# Altium PCB EEG_PCB.PcbDoc (part 1 of 2)
Units mm, origin at the board's own origin, x right, y up, seen from the top; angles counter-clockwise.
Board outline 100 x 50 mm, 4 copper layers (Top Layer, GND Layer, Power Layer, Bottom Layer), stack 0.568 mm thick; 118 components, 80 nets, 412 pads, 345 vias.
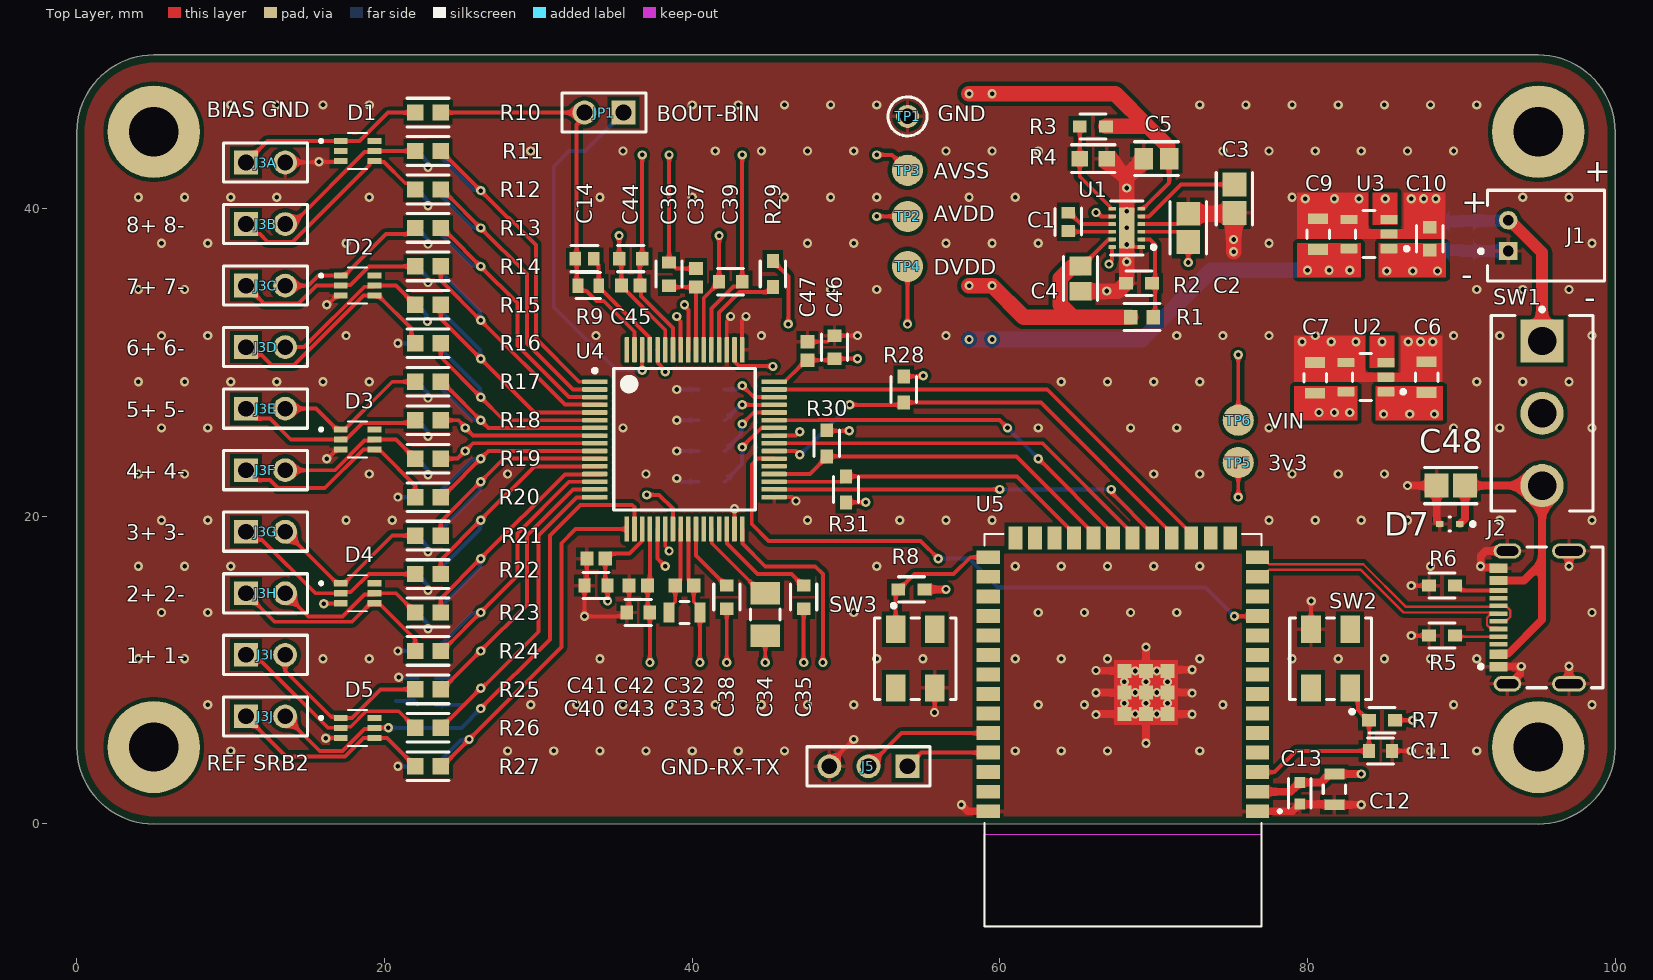
[diagram p0: Top Layer view]
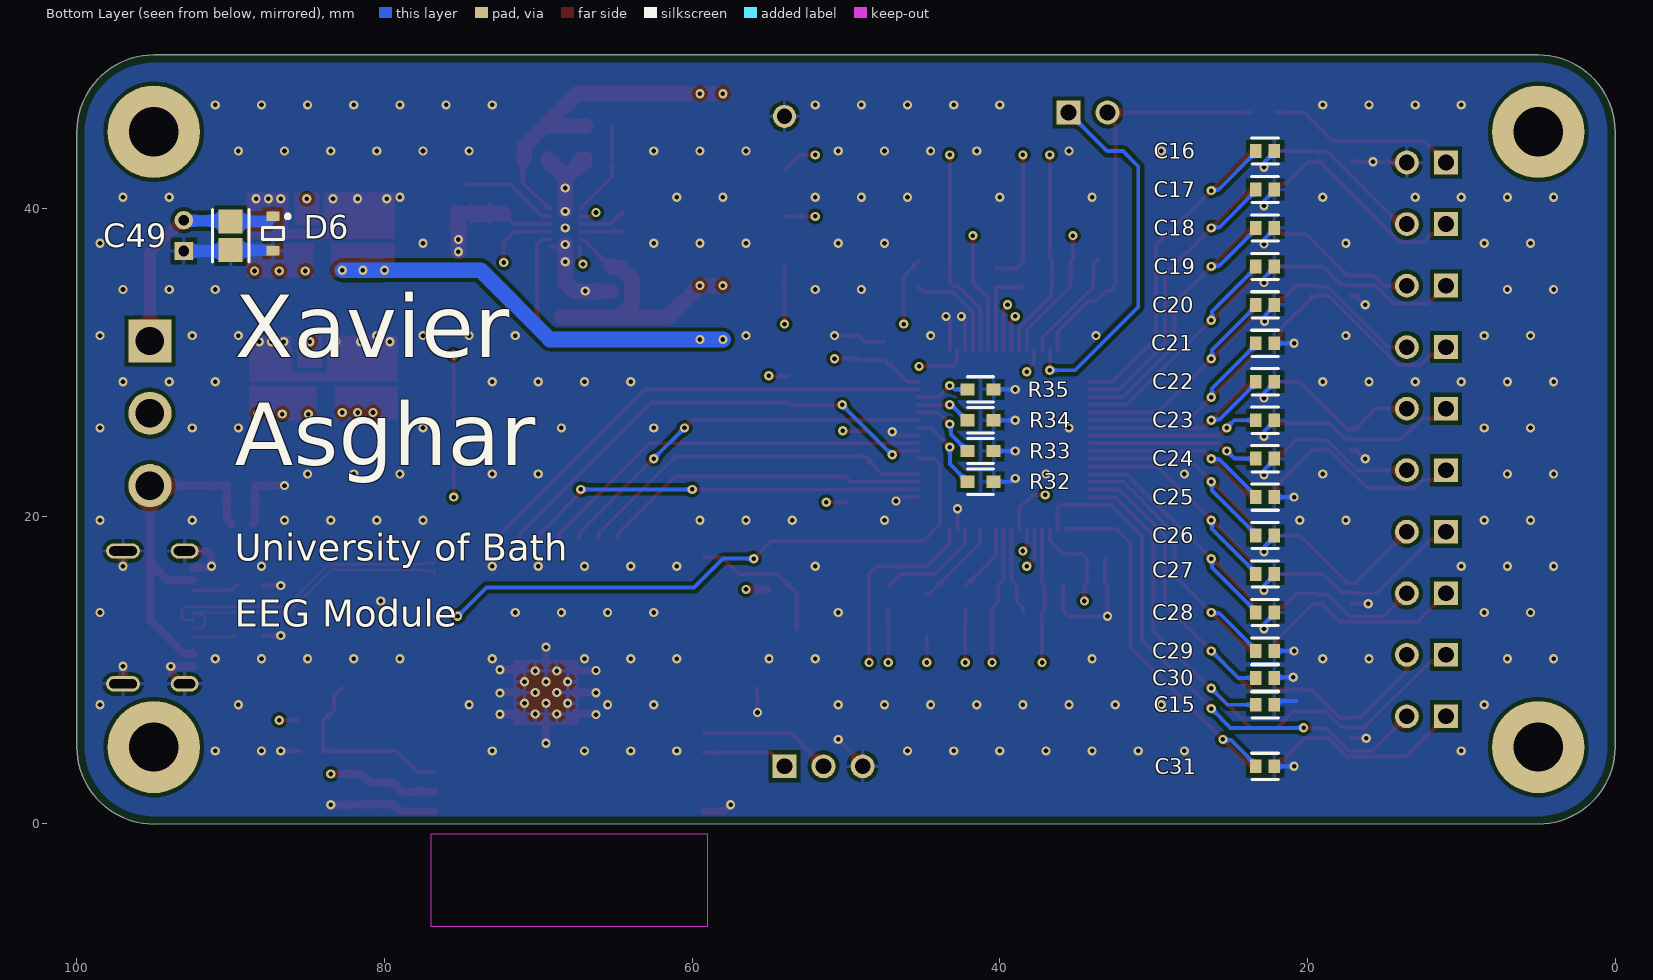
[diagram p1: Bottom Layer view, seen from below]
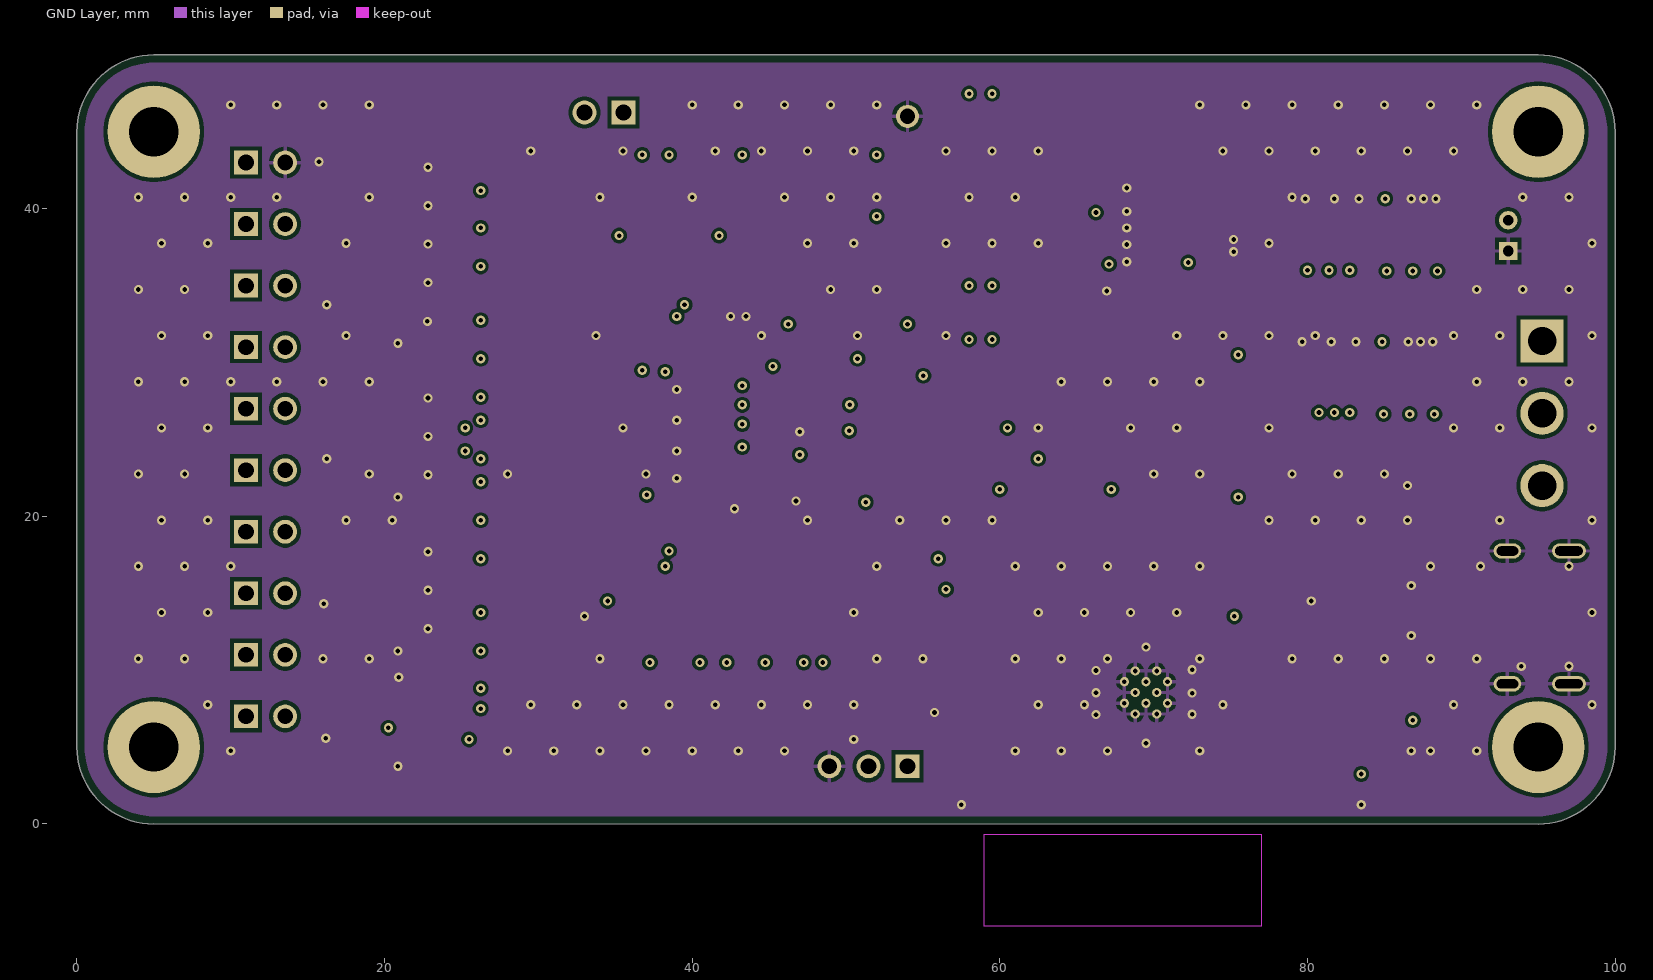
[diagram p2: GND Layer]
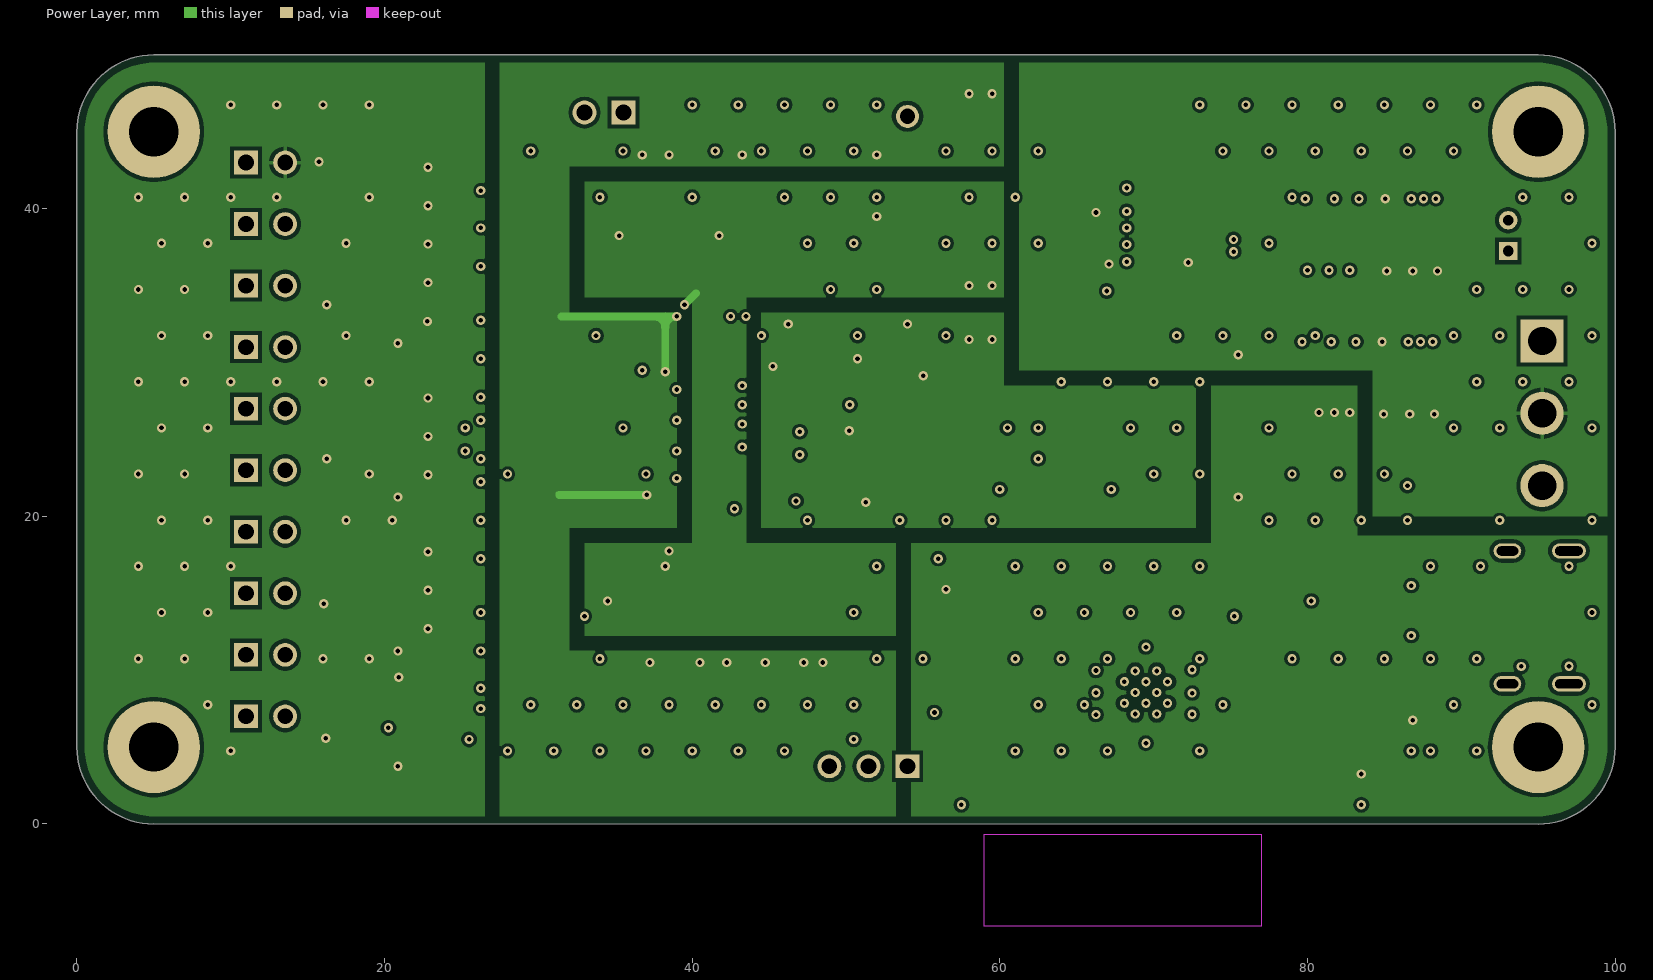
[diagram p3: Power Layer]
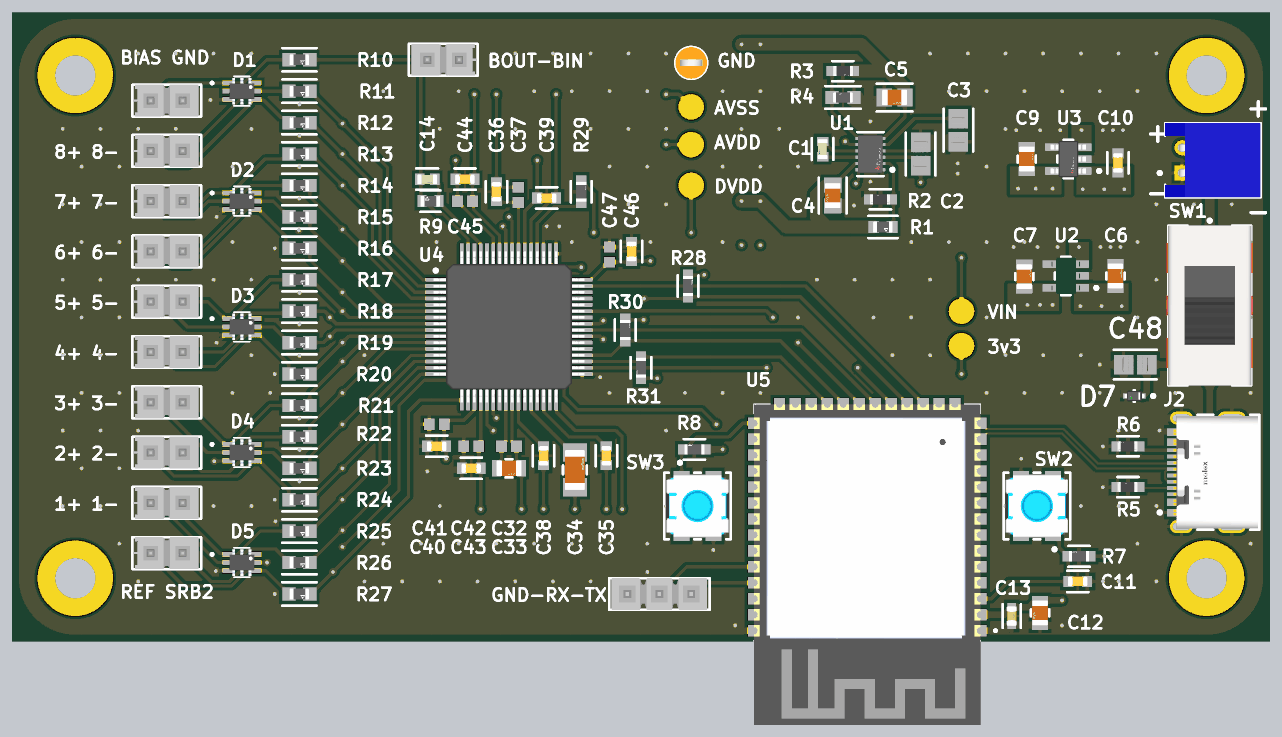
[diagram p5: 3D render of the assembled board from above, using the file's embedded part models]
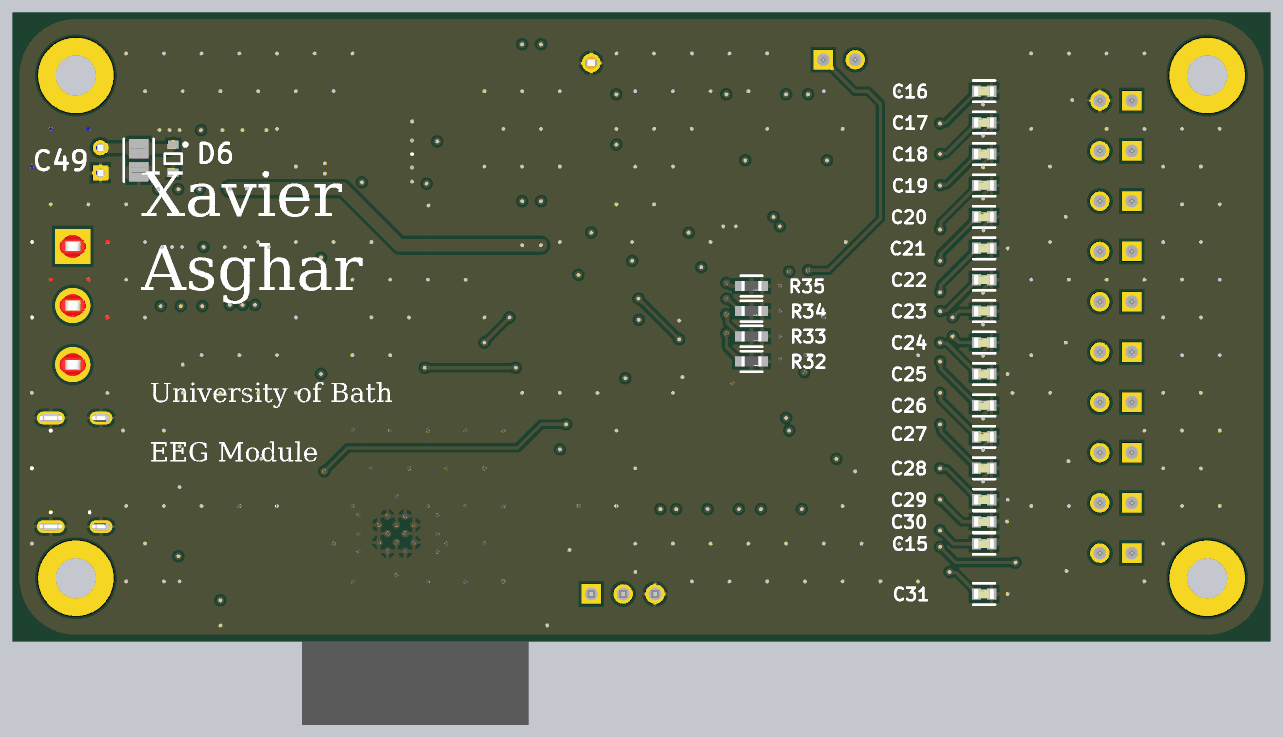
[diagram p6: 3D render of the assembled board from below, using the file's embedded part models]

## Layer stack, top to bottom
Top Solder: solder mask 0.0102, Solder Resist, Dk 3.5
Top Layer: signal copper 0.0356
Dielectric 2: prepreg 0.0711, PP-006, Dk 4.1
GND Layer: signal copper 0.0175
Dielectric 1: dielectric 0.32, FR-4, Dk 4.8
Power Layer: signal copper 0.0175
Dielectric 3: prepreg 0.0711, PP-006, Dk 4.1
Bottom Layer: signal copper 0.0356
Bottom Solder: solder mask 0.0102, Solder Resist, Dk 3.5

## Board outline
0,5 ccw(c5,5) 5,0 95,0 ccw(c95,5) 100,5 100,45 ccw(c95,45) 95,50 5,50 ccw(c5,45) 0,45

## Design rules (kind name [scope] priority, off if disabled: settings)
BoardOutlineClearance [All] p1: gap=0.508 ignorepadtopadclearanceinfootprint=FALSE except(0.3: Track-OutlineEdge Track-CavityEdge Track-CutoutEdge Track-SplitBarrior Track-SplitContinuation SMDPad-OutlineEdge SMDPad-CavityEdge SMDPad-CutoutEdge SMDPad-SplitBarrior SMDPad-SplitContinuation)
Clearance [All] p1: gap=0.254 ignorepadtopadclearanceinfootprint=FALSE except(0.1: Arc-Arc Arc-Track Arc-SMDPad Track-Track Track-SMDPad; 0.15: SMDPad-SMDPad; 0.2: Arc-Via Track-Via Via-Fill Via-Poly Via-Region Via-Hole; 0.45: SMDPad-Hole)
DiffPairsRouting [All] p1: maxlimit=0.254 minlimit=0.203 mostfreqgap=0.254 toplayer_maxgap=0.203 toplayer_prefgap=0.203 toplayer_minwidth=0.158 toplayer_maxwidth=0.158 toplayer_prefwidth=0.158 midlayer1_mingap=0.254 midlayer1_minwidth=0.381 midlayer1_maxwidth=0.381 midlayer1_prefwidth=0.381 midlayer2_mingap=0.254 midlayer2_minwidth=0.381 midlayer2_maxwidth=0.381 midlayer2_prefwidth=0.381 bottomlayer_mingap=0.254 bottomlayer_minwidth=0.381 bottomlayer_maxwidth=0.381 bottomlayer_prefwidth=0.381 maxuncoupledlength=12.7
HoleSize [All] p1: absolutevalues=TRUE maxlimit=6.3 minlimit=0.15 maxpercent=80.000 minpercent=20.000
HoleToHoleClearance [All] p1: gap=0.2 allowstackedmicrovias=TRUE
MinimumSolderMaskSliver [All] p1: minsoldermaskwidth=0.1
PlaneConnect [All] p1: pad.planeconnectstyle=Relief pad.reliefexpansion=0.508 pad.reliefentries=4 pad.reliefconductorwidth=0.254 pad.reliefairgap=0.254 via.planeconnectstyle=Direct via.reliefexpansion=0.508 via.reliefentries=4 via.reliefconductorwidth=0.254 via.reliefairgap=0.254
PolygonConnect [All] p1: thpad.connectstyle=Relief thpad.reliefconductorwidth=0.254 thpad.reliefentries=4 thpad.polygonreliefangle="90 Angle" thpad.airgapwidth=0.254 smdpad.connectstyle=Relief smdpad.reliefconductorwidth=0.254 smdpad.reliefentries=4 smdpad.polygonreliefangle="90 Angle" smdpad.airgapwidth=0.254 via.connectstyle=Direct via.reliefconductorwidth=0.254 via.reliefentries=4 via.polygonreliefangle="90 Angle" via.airgapwidth=0.254
RoutingVias [All] p1: holewidth=0.3 width=0.6 viastyle="Through Hole" minholewidth=0.15 minwidth=0.25 maxholewidth=0.711 maxwidth=1.27
SilkToSilkClearance [All] p1: silktosilkclearance=0.15
SilkToSolderMaskClearance [IsPad] p1: minsilkscreentomaskgap=0.2 clearancetoexposedcopper=TRUE
SolderMaskExpansion SolderMaskExpansion_Vias [IsVia] p1: expansion=0.102 istentingtop=TRUE
SolderMaskExpansion SolderMaskExpansion_All [All] p2: expansion=0.05 istentingtop=FALSE
SupplyNets "Schematic Supply Nets_8" [InNet('AVSS')] p1: voltage=0.000
SupplyNets "Schematic Supply Nets_7" [InNet('VBUS')] p2: voltage=0.000
SupplyNets "Schematic Supply Nets_6" [InNet('DVDD')] p3: voltage=0.000
SupplyNets "Schematic Supply Nets_4" [InNet('VIN')] p4: voltage=0.000
SupplyNets "Schematic Supply Nets_3" [InNet('3v3')] p5: voltage=0.000
SupplyNets "Schematic Supply Nets_2" [InNet('AVDD')] p6: voltage=0.000
SupplyNets "Schematic Supply Nets_1" [InNet('VBAT')] p7: voltage=0.000
SupplyNets "Schematic Supply Nets" [InNet('GND')] p8: voltage=0.000
Width [All] p1: maxlimit=1.27 minlimit=0.1 preferedwidth=1.016 toplayer_prefwidth=0.254 midlayer1_prefwidth=0.254 bottomlayer_prefwidth=0.254 minimp=50.000000 maximp=50.000000 favimp=50.000000
23 further rules are at their usual default settings.

## Classes and differential pairs
differential pair USB_D: +USB_D_P -USB_D_N

## Components (designator, comment, footprint, x,y, rotation, side; value= is the part's Value field where it differs from the comment)
C1 "0.47uF" FP-C0603C-CF-MFG 64.45,39.15 r90 top value="0.47 μF"
C2 "4.7uF" FP-GCJ21B-0_3-IPC_A 72.25,38.75 r90 top
C3 "4.7uF" FP-GCJ21B-0_3-IPC_A 75.25,40.65 r270 top
C4 "2.2uF" FP-GCM21B-0_15-IPC_B 65.25,35.45 r270 top
C5 "2.2uF" FP-GCM21B-0_15-IPC_B 70.176,43.25 r0 top
C6 "10uF" FP-GRJ21B-0_3-0_2-MFG 87.75,29.05 r90 top
C7 "10uF" FP-GRJ21B-0_3-0_2-MFG 80.5,29 r90 top
C9 "10uF" FP-GRJ21B-0_3-0_2-MFG 80.7,38.35 r90 top
C10 "1uF" FP-CC0603-DA-MFG 87.95,38.05 r90 top value="1 uF"
C11 "1uF" FP-CC0603-DA-MFG 84.75,4.75 r0 top value="1 uF"
C12 "10uF" FP-GRJ21B-0_3-0_2-MFG 81.75,2.25 r270 top
C13 "0.1uF" FP-CGA3E-0_3-0_1-MFG 79.5,2 r270 top
C14 "1.5nF" FP-C0603C-CF-MFG 33,36.75 r180 top value="1,500 pF"
C15 "1nF" FP-C0603C-CF-MFG 22.75,7.75 r180 bottom value="1,000 pF"
C16 "1nF" FP-C0603C-CF-MFG 22.75,43.75 r180 bottom value="1,000 pF"
C17 "1nF" FP-C0603C-CF-MFG 22.75,41.25 r180 bottom value="1,000 pF"
C18 "1nF" FP-C0603C-CF-MFG 22.75,38.75 r180 bottom value="1,000 pF"
C19 "1nF" FP-C0603C-CF-MFG 22.75,36.25 r180 bottom value="1,000 pF"
C20 "1nF" FP-C0603C-CF-MFG 22.75,33.75 r180 bottom value="1,000 pF"
C21 "1nF" FP-C0603C-CF-MFG 22.75,31.25 r180 bottom value="1,000 pF"
C22 "1nF" FP-C0603C-CF-MFG 22.75,28.75 r180 bottom value="1,000 pF"
C23 "1nF" FP-C0603C-CF-MFG 22.75,26.25 r180 bottom value="1,000 pF"
C24 "1nF" FP-C0603C-CF-MFG 22.75,23.75 r180 bottom value="1,000 pF"
C25 "1nF" FP-C0603C-CF-MFG 22.75,21.25 r180 bottom value="1,000 pF"
C26 "1nF" FP-C0603C-CF-MFG 22.75,18.75 r180 bottom value="1,000 pF"
C27 "1nF" FP-C0603C-CF-MFG 22.75,16.25 r180 bottom value="1,000 pF"
C28 "1nF" FP-C0603C-CF-MFG 22.75,13.75 r180 bottom value="1,000 pF"
C29 "1nF" FP-C0603C-CF-MFG 22.75,11.25 r180 bottom value="1,000 pF"
C30 "1nF" FP-C0603C-CF-MFG 22.75,9.5 r180 bottom value="1,000 pF"
C31 "1nF" FP-C0603C-CF-MFG 22.75,3.75 r180 bottom value="1,000 pF"
C32 "0.1uF" CAPC1608X87X45LL20T05 39.5,15.5 r180 top
C33 "10uF" FP-GRJ21B-0_3-0_2-MFG 39.5,13.75 r0 top
C34 "100uF" FP-GRM31C-0_3-e0_3_0_8-IPC_B 44.75,13.625 r90 top
C35 "1uF" FP-CC0603-DA-MFG 47.25,14.75 r270 top value="1 uF"
C36 "1uF" FP-CC0603-DA-MFG 38.5,35.75 r90 top value="1 uF"
C37 "0.1uF" CAPC1608X87X45LL20T05 40.25,35.5 r270 top
C38 "1uF" FP-CC0603-DA-MFG 42.25,14.75 r270 top value="1 uF"
C39 "1uF" FP-CC0603-DA-MFG 42.5,35.25 r0 top value="1 uF"
C40 "1uF" FP-CC0603-DA-MFG 33.75,15.5 r180 top value="1 uF"
C41 "0.1uF" CAPC1608X87X45LL20T05 33.75,17.25 r0 top
C42 "0.1uF" CAPC1608X87X45LL20T05 36.5,15.5 r0 top
C43 "1uF" FP-CC0603-DA-MFG 36.5,13.75 r180 top value="1 uF"
C44 "1uF" FP-CC0603-DA-MFG 36,36.75 r0 top value="1 uF"
C45 "0.1uF" CAPC1608X87X45LL20T05 36,35 r180 top
C46 "1uF" FP-CC0603-DA-MFG 49.25,31 r90 top value="1 uF"
C47 "0.1uF" CAPC1608X87X45LL20T05 47.5,30.75 r270 top
C48 "4.7uF" FP-GCJ21B-0_3-IPC_A 89.325,22 r180 top
C49 "4.7uF" FP-GCJ21B-0_3-IPC_A 90,38.25 r270 bottom
D1 "TPD4E1B06DCKR" TVS_TPD4E1B06DCKR 18.25,43.75 r0 top
D2 "TPD4E1B06DCKR" TVS_TPD4E1B06DCKR 18.25,35 r0 top
D3 "TPD4E1B06DCKR" TVS_TPD4E1B06DCKR 18.25,25 r0 top
D4 "TPD4E1B06DCKR" TVS_TPD4E1B06DCKR 18.25,15 r0 top
D5 "TPD4E1B06DCKR" TVS_TPD4E1B06DCKR 18.25,6.25 r0 top
D6 "SD05T1G" ONSC-SOD-323-2-477-02_G_V 87.25,38.385 r270 bottom
D7 "ESD5Z5.0T5G" FP-502-01-MFG 89.25,19.5 r180 top
J1 "S2B-PH-K-S(LF)(SN)" JST-S2B-PH-K-S_V 95.5,38.25 r90 top
J2 "217179-0001" FP-2171790001-MFG 95.85,13.43 r90 top
J3A "TSW-102-26-F-S" SMTC-TSW-102-26-XX-S 11,43 r0 top
J3B "TSW-102-26-F-S" SMTC-TSW-102-26-XX-S 11,39 r0 top
J3C "TSW-102-26-F-S" SMTC-TSW-102-26-XX-S 11,35 r0 top
J3D "TSW-102-26-F-S" SMTC-TSW-102-26-XX-S 11,31 r0 top
J3E "TSW-102-26-F-S" SMTC-TSW-102-26-XX-S 11,27 r0 top
J3F "TSW-102-26-F-S" SMTC-TSW-102-26-XX-S 11,23 r0 top
J3G "TSW-102-26-F-S" SMTC-TSW-102-26-XX-S 11,19 r0 top
J3H "TSW-102-26-F-S" SMTC-TSW-102-26-XX-S 11,15 r0 top
J3I "TSW-102-26-F-S" SMTC-TSW-102-26-XX-S 11,11 r0 top
J3J "TSW-102-26-F-S" SMTC-TSW-102-26-XX-S 11,7 r0 top
J5 "TSW-103-07-T-S" SMTC-TSW-103-07-X-S 54,3.75 r180 top
JP1 "TSW-102-26-F-S" SMTC-TSW-102-26-XX-S 35.54,46.25 r180 top
R1 "130k" FP-MCT0603-IPC_B 69.25,32.95 r0 top
R2 "120k" FP-RT0603-MFG 69.05,35.15 r180 top value=120KΩ
R3 "105k" FP-RT0603-MFG 66.05,45.35 r0 top value=105KΩ
R4 "100k" FP-AT0603-IPC_A 66.073,43.25 r180 top
R5 "5.1k" FP-RT0603-MFG 88.75,12.25 r180 top value=5.1KΩ
R6 "5.1k" FP-RT0603-MFG 88.75,15.5 r180 top value=5.1KΩ
R7 "10k" FP-AC0603-MFG 84.85,6.75 r180 top
R8 "10k" FP-AC0603-MFG 54.25,15.25 r180 top
R9 "1M" FP-MCT0603-MFG 33.25,35 r180 top
R10 "2.2k" FP-MCT0603-IPC_A 22.829,46.25 r0 top
R11 "2.2k" FP-MCT0603-IPC_A 22.829,43.75 r0 top
R12 "2.2k" FP-MCT0603-IPC_A 22.829,41.25 r0 top
R13 "2.2k" FP-MCT0603-IPC_A 22.829,38.75 r0 top
R14 "2.2k" FP-MCT0603-IPC_A 22.829,36.25 r0 top
R15 "2.2k" FP-MCT0603-IPC_A 22.829,33.75 r0 top
R16 "2.2k" FP-MCT0603-IPC_A 22.829,31.25 r0 top
R17 "2.2k" FP-MCT0603-IPC_A 22.829,28.75 r0 top
R18 "2.2k" FP-MCT0603-IPC_A 22.829,26.25 r0 top
R19 "2.2k" FP-MCT0603-IPC_A 22.829,23.75 r0 top
R20 "2.2k" FP-MCT0603-IPC_A 22.829,21.25 r0 top
R21 "2.2k" FP-MCT0603-IPC_A 22.829,18.75 r0 top
R22 "2.2k" FP-MCT0603-IPC_A 22.829,16.25 r0 top
R23 "2.2k" FP-MCT0603-IPC_A 22.829,13.75 r0 top
R24 "2.2k" FP-MCT0603-IPC_A 22.829,11.25 r0 top
R25 "2.2k" FP-MCT0603-IPC_A 22.829,8.75 r0 top
R26 "2.2k" FP-MCT0603-IPC_A 22.829,6.25 r0 top
R27 "2.2k" FP-MCT0603-IPC_A 22.829,3.75 r0 top
R28 "10k" FP-AC0603-MFG 53.75,28.25 r90 top
R29 "10k" FP-AC0603-MFG 45.25,35.75 r90 top
R30 "10k" FP-AC0603-MFG 48.75,24.75 r90 top
R31 "10k" FP-AC0603-MFG 50,21.75 r270 top
R32 "10k" FP-AC0603-MFG 41.25,22.25 r180 bottom
R33 "10k" FP-AC0603-MFG 41.25,24.25 r180 bottom
R34 "10k" FP-AC0603-MFG 41.25,26.25 r180 bottom
R35 "10k" FP-AC0603-MFG 41.25,28.25 r180 bottom
SW1 "1101M2S3CQE2" FP-1101M2S3CQE2-MFG 95.25,26.7 r270 top
SW2 "7914J-1-032" FP-7914J-1-032-MFG 81.5,10.75 r180 top
SW3 "7914J-1-032" FP-7914J-1-032-MFG 54.5,10.75 r0 top
TP1 "" KSTN-5003 54,46 r0 top
TP2 "TP" TP_SMD_2MM 54,39.5 r0 top
TP3 "TP" TP_SMD_2MM 54,42.5 r0 top
TP4 "TP" TP_SMD_2MM 54,36.25 r0 top
TP5 "TP" TP_SMD_2MM 75.5,23.5 r0 top
TP6 "TP" TP_SMD_2MM 75.5,26.25 r0 top
U1 "LM27762DSSR" FP-DSS0012B-MFG 68.25,38.75 r180 top
U2 "TLV75733PDBVR" FP-DBV0005A-MFG 83.8,29.05 r180 top
U3 "TPS7A2033PDBVR" FP-DBV0005A-MFG 84,38.35 r180 top
U4 "ADS1299IPAGR" PAG0064A_M 39.5,25 r0 top
U5 "ESP32-S3-WROOM-1-N8R8" XCVR_ESP32S3WROOM1N8R8 68,6.09 r180 top

## Footprints (in the part's own frame and the unit in brackets; to place one, negate y for a bottom-side part, rotate by r counter-clockwise, add the part's x,y. Pads: shape width x height; smd on the part's side, far side on the other; paste and mask are expansions set on the pad)
CAPC1608X87X45LL20T05 [mm] "Chip Capacitor, 2-Leads, Body 1.60x0.80mm, IPC High Density"
  rect 0.85x0.9 smd: 1(-0.6,0) 2(0.6,0)
  body extent -0.9,-0.5 0.9,0.5, height 0.87
FP-502-01-MFG [mm]
  rect 0.48x0.4 smd paste+0 mask+0: 1(-0.66,0) 2(0.66,0)
  silkscreen extent -1.63,-0.45 0.05,0.45, body extent -1,-0.55 1,0.55, height 0.25
FP-1101M2S3CQE2-MFG [mm]
  rect 2.8x2.8 hole 1.85 paste-2539.97 mask+0: 1(-4.7,0)
  round 2.8 hole 1.85 paste-2539.97 mask+0: 2(0,0) 3(4.7,0)
  silkscreen extent -6.87,-3.3 6.35,3.3, body extent -6.45,-3.4 6.45,3.4, height 0.25
FP-7914J-1-032-MFG [mm]
  rect 1.27x1.78 smd paste+0 mask+0: 1_1-(-1.27,1.905) 1_2+(1.27,1.905) 2_1-(-1.27,-1.905) 2_2+(1.27,-1.905)
  silkscreen extent -2.65,-2.65 2.65,3.57, body extent -2.75,-2.9 2.75,2.9, height 0.25
FP-2171790001-MFG [mm]
  rrect100% 1x1.8 hole 1.4 slot 0.6 at 0 deg paste-2539.97 mask+0: 1(-4.32,2.85) 2(4.32,2.85)
  rrect100% 1x2.2 hole 1.8 slot 0.6 at 0 deg paste-2539.97 mask+0: 3(-4.32,-1.15) 4(4.32,-1.15)
  rect 0.6x1.15 smd paste+0 mask+0: A1-B12(-3.2,3.425) A4-B9(-2.4,3.425) B1-A12(3.2,3.425) B4-A9(2.4,3.425)
  rect 0.3x1.15 smd paste+0 mask+0: A5(-1.25,3.425) A6(-0.25,3.425) A7(0.25,3.425) A8(1.25,3.425) B5(1.75,3.425) B6(0.75,3.425) B7(-0.75,3.425) B8(-1.75,3.425)
  silkscreen extent -4.57,-3.35 4.57,4.7, body extent -4.92,-3.45 4.92,4.1, height 0.25
FP-AC0603-MFG [mm]
  rect 0.9x0.8 smd paste+0 mask+0: 1(-0.85,0) 2(0.85,0)
  silkscreen extent -0.85,-0.82 0.85,0.82, body extent -1.4,-0.55 1.4,0.55, height 0.25
FP-AT0603-IPC_A [mm]
  rect 1.059x1.012 smd paste+0 mask+0: 1(-0.877,0) 2(0.877,0)
  silkscreen extent -1.41,-0.91 1.41,0.91, body extent -1.91,-1.01 1.91,1.01, height 0.25
FP-C0603C-CF-MFG [mm]
  rect 0.75x0.9 smd paste+0 mask+0: 1(-0.6,0) 2(0.6,0)
  silkscreen extent -0.87,-0.85 0.88,0.85, body extent -1.2,-0.6 1.2,0.6, height 0.25
FP-CC0603-DA-MFG [mm]
  rect 0.8x0.9 smd paste+0 mask+0: 1(-0.75,0) 2(0.75,0)
  silkscreen extent -0.85,-0.85 0.85,0.85, body extent -1.35,-0.75 1.35,0.75, height 0.25
FP-CGA3E-0_3-0_1-MFG [mm]
  rect 0.7x0.7 smd paste+0 mask+0: 1(-0.7,0) 2(0.7,0)
  silkscreen extent -0.95,-0.72 0.95,0.72, body extent -1.15,-0.65 1.15,0.65, height 0.25
FP-DBV0005A-MFG [mm]
  rrect17% 1.1x0.6 smd paste+0 mask+0: 1(-1.3,0.95) 2(-1.3,0) 3(-1.3,-0.95) 4(1.3,-0.95) 5(1.3,0.95)
  silkscreen extent -2.55,-1.53 0.87,1.52, body extent -1.95,-1.78 1.95,1.78, height 0.25
FP-DSS0012B-MFG [mm]
  rrect40% 0.5x0.25 smd paste+0 mask+0: 1(-0.95,1.25) 2(-0.95,0.75) 3(-0.95,0.25) 4(-0.95,-0.25) 5(-0.95,-0.75) 6(-0.95,-1.25) 7(0.95,-1.25) 8(0.95,-0.75) 9(0.95,-0.25) 10(0.95,0.25) 11(0.95,0.75) 12(0.95,1.25)
  rrect10% 1x2.65 smd paste-1000 mask+0: 13(0,0)
  silkscreen extent -1.88,-1.75 1.05,1.75, body extent -1.3,-1.65 1.3,1.65, height 0.25
FP-GCJ21B-0_3-IPC_A [mm]
  rect 1.553x1.556 smd paste+0 mask+0: 1(-0.925,0) 2(0.925,0)
  silkscreen extent -1.7,-1.18 1.7,1.18, body extent -2.2,-1.28 2.2,1.28, height 0.25
FP-GCM21B-0_15-IPC_B [mm]
  rect 1.206x1.408 smd paste+0 mask+0: 1(-0.826,0) 2(0.826,0)
  silkscreen extent -1.43,-1.1 1.43,1.1, body extent -1.68,-0.95 1.68,0.95, height 0.25
FP-GRJ21B-0_3-0_2-MFG [mm]
  rect 0.7x1.3 smd paste+0 mask+0: 1(-1,0) 2(1,0)
  silkscreen extent -0.28,-0.72 0.28,0.72, body extent -1.45,-0.82 1.45,0.82, height 0.25
FP-GRM31C-0_3-e0_3_0_8-IPC_B [mm]
  rect 1.453x1.904 smd paste+0 mask+0: 1(-1.375,0) 2(1.375,0)
  silkscreen extent -0.35,-0.95 0.35,0.95, body extent -2.35,-1.2 2.35,1.2, height 0.25
FP-MCT0603-IPC_A [mm]
  rect 1.064x1.062 smd paste+0 mask+0: 1(-0.829,0) 2(0.829,0)
  silkscreen extent -1.36,-0.93 1.36,0.93, body extent -1.86,-1.03 1.86,1.03, height 0.25
FP-MCT0603-IPC_B [mm]
  rect 0.864x0.962 smd paste+0 mask+0: 1(-0.729,0) 2(0.729,0)
  silkscreen extent -1.16,-0.88 1.16,0.88, body extent -1.41,-0.73 1.41,0.73, height 0.25
FP-MCT0603-MFG [mm]
  rect 0.7x0.95 smd paste+0 mask+0: 1(-0.675,0) 2(0.675,0)
  silkscreen extent -0.8,-0.85 0.8,0.85, body extent -1.12,-0.58 1.12,0.58, height 0.25
FP-RT0603-MFG [mm]
  rect 0.9x0.8 smd paste+0 mask+0: 1(-0.85,0) 2(0.85,0)
  silkscreen extent -0.85,-0.81 0.86,0.8, body extent -1.4,-0.55 1.4,0.55, height 0.25
JST-S2B-PH-K-S_V [mm] "THD, 2-Leads, Body 7.6x5.9mm, Pitch 2mm"
  rect 1.2x1.2 hole 0.7: 1(-1,2.45)
  round 1.2 hole 0.7: 2(1,2.45)
  silkscreen extent -2.95,-3.8 2.95,4.35, body extent -2.95,-3.8 2.95,3.8, height 4.8
KSTN-5003 [mm] "Test Point, Through Hole, Dia 2.54mm"
  round 1.5 hole 1: 1(0,0)
  silkscreen extent -1.27,-1.27 1.27,1.27, body extent -1.27,-1.27 1.27,1.27, height 4.57
ONSC-SOD-323-2-477-02_G_V [mm] "SOD, 2-Leads, Body 1.7x1.25mm"
  rect 0.63x0.83 smd: 1(-1.115,0) 2(1.115,0)
  silkscreen extent -1.24,-0.67 0.4,1.09, body extent -0.85,-0.63 0.85,0.63, height 1.06
PAG0064A_M [mm] "QFP, 64-Leads, Body 10x10mm, Pitch 0.5mm, IPC Low Density"
  rrect33% 1.65x0.3 smd: 1(-5.825,3.75) 2(-5.825,3.25) 3(-5.825,2.75) 4(-5.825,2.25) 5(-5.825,1.75) 6(-5.825,1.25) 7(-5.825,0.75) 8(-5.825,0.25) 9(-5.825,-0.25) 10(-5.825,-0.75) 11(-5.825,-1.25) 12(-5.825,-1.75) 13(-5.825,-2.25) 14(-5.825,-2.75) 15(-5.825,-3.25) 16(-5.825,-3.75) 33(5.825,-3.75) 34(5.825,-3.25) 35(5.825,-2.75) 36(5.825,-2.25) 37(5.825,-1.75) 38(5.825,-1.25) 39(5.825,-0.75) 40(5.825,-0.25) 41(5.825,0.25) 42(5.825,0.75) 43(5.825,1.25) 44(5.825,1.75) 45(5.825,2.25) 46(5.825,2.75) 47(5.825,3.25) 48(5.825,3.75)
  rrect33% 0.3x1.65 smd: 17(-3.75,-5.825) 18(-3.25,-5.825) 19(-2.75,-5.825) 20(-2.25,-5.825) 21(-1.75,-5.825) 22(-1.25,-5.825) 23(-0.75,-5.825) 24(-0.25,-5.825) 25(0.25,-5.825) 26(0.75,-5.825) 27(1.25,-5.825) 28(1.75,-5.825) 29(2.25,-5.825) 30(2.75,-5.825) 31(3.25,-5.825) 32(3.75,-5.825) 49(3.75,5.825) 50(3.25,5.825) 51(2.75,5.825) 52(2.25,5.825) 53(1.75,5.825) 54(1.25,5.825) 55(0.75,5.825) 56(0.25,5.825) 57(-0.25,5.825) 58(-0.75,5.825) 59(-1.25,5.825) 60(-1.75,5.825) 61(-2.25,5.825) 62(-2.75,5.825) 63(-3.25,5.825) 64(-3.75,5.825)
  silkscreen extent -5.95,-4.6 4.6,4.6, body extent -6,-6 6,6, height 1.09
SMTC-TSW-102-26-XX-S [mm] ".025 SQ Post Terminal Strip Assembly, 1x2 Pins, Vertical, 2.54mm Pitch, Male"
  rect 1.55x1.55 hole 1.02: 1(0,0)
  round 1.55 hole 1.02: 2(2.54,0)
  silkscreen extent -1.46,-1.27 4,1.27, body extent -1.4,-1.27 3.81,1.27, height 8.38
SMTC-TSW-103-07-X-S [mm] ".025 SQ Post Terminal Strip Assembly, 1x3 Pins, Vertical, 2.54mm Pitch, Male"
  rect 1.55x1.55 hole 1.02: 1(0,0)
  round 1.55 hole 1.02: 2(2.54,0) 3(5.08,0)
  silkscreen extent -1.46,-1.27 6.54,1.27, body extent -1.27,-1.27 6.35,1.27, height 8.38
TP_SMD_2MM [mil] "Circular Test Point (2mm radius)"
  round 80 smd paste-99999 mask+4: 1(0,0)
TVS_TPD4E1B06DCKR [mm]
  rect 0.9x0.4 smd paste-0.025: 1(-1.1,0.65) 2(-1.1,0) 3(-1.1,-0.65) 4(1.1,-0.65) 5(1.1,0) 6(1.1,0.65)
  silkscreen extent -2.47,-1.17 0.63,1.17, body extent -1.05,-1 1.05,1, height 1.1
XCVR_ESP32S3WROOM1N8R8 [mm]
  rect 1.5x0.9 smd: 1(-8.75,5.26) 2(-8.75,3.99) 3(-8.75,2.72) 4(-8.75,1.45) 5(-8.75,0.18) 6(-8.75,-1.09) 7(-8.75,-2.36) 8(-8.75,-3.63) 9(-8.75,-4.9) 10(-8.75,-6.17) 11(-8.75,-7.44) 12(-8.75,-8.71) 13(-8.75,-9.98) 14(-8.75,-11.25) 27(8.75,-11.25) 28(8.75,-9.98) 29(8.75,-8.71) 30(8.75,-7.44) 31(8.75,-6.17) 32(8.75,-4.9) 33(8.75,-3.63) 34(8.75,-2.36) 35(8.75,-1.09) 36(8.75,0.18) 37(8.75,1.45) 38(8.75,2.72) 39(8.75,3.99) 40(8.75,5.26)
  rect 0.9x1.5 smd: 15(-6.985,-12.5) 16(-5.715,-12.5) 17(-4.445,-12.5) 18(-3.175,-12.5) 19(-1.905,-12.5) 20(-0.635,-12.5) 21(0.635,-12.5) 22(1.905,-12.5) 23(3.175,-12.5) 24(4.445,-12.5) 25(5.715,-12.5) 26(6.985,-12.5)
  rect 0.9x0.9 smd: 41_1(-1.5,-2.46) 41_2(-2.9,-2.46) 41_3(-0.1,-2.46) 41_4(-2.9,-3.86) 41_5(-1.5,-3.86) 41_6(-0.1,-3.86) 41_7(-2.9,-1.06) 41_8(-1.5,-1.06) 41_9(-0.1,-1.06)
  round 0.6 hole 0.3 mask+0: 41_10(-1.5,-1.76) 41_11(-2.9,-1.76) 41_12(-0.1,-1.76) 41_13(-2.9,-3.16) 41_14(-1.5,-3.16) 41_15(-0.1,-3.16) 41_16(-2.2,-1.06) 41_17(-0.8,-1.06) 41_18(-2.2,-2.46) 41_19(-0.8,-2.46) 41_20(-2.2,-3.86) 41_21(-0.8,-3.86)
  Keep-Out Layer region: 9,6.75 -9,6.75 -9,12.75 9,12.75
  Keep-Out Layer region: 9,6.75 -9,6.75 -9,12.75 9,12.75
  silkscreen extent -10.3,-12.75 9,12.75, body extent -9,-12.75 9,12.75, height 3.25

## Part data
C1: library part CMP-03020-032491-1, "Cap Ceramic 0.47uF 16V X7R 10% Pad SMD 0603 125C Automotive T/R", Capacitance="0.47 μF", Manufacturer=KEMET, Manufacturer Part Number=C0603C474K4RACAUTO, Package=C0603C-CF, Temperature="-55°C to +125°C", Temperature Characteristic=X7R, Temperature Coefficient=30ppm/°C, Temperature Range High=+125°C, Temperature Range Low=-55°C, Tolerance=0.1, Voltage Rating="16 V", Automotive=Yes, Automotive Grade="Grade 1", Category=Cap, ComponentLink2Description=Datasheet, ComponentLink2URL=https://api.kemet.com/component-edge/download/datasheet/C0603C100J5GACAUTO.pdf, Device Class L1="Passive Components", Device Class L2=Capacitors, Device Class L3="Ceramic Capacitors", Digikey Description="Cap Ceramic 0.47uF 16V X7R 10% Pad SMD 0603 125C Automotive T/R", Height=0.87mm, Lead Free=Yes, Material=Ceramic, Octopart=https://octopart.com/c0603c474k4racauto-kemet-25528703, RoHS=TRUE
C2 C3 C48 C49: library part CMP-06035-051513-1, "Multilayer Ceramic Capacitors MLCC - SMD/SMT 0805 4.7uF 10%, 16VDC,  X7R 15%", Case Code (Imperial)=0805, Case Code (Metric)=2012, Dielectric=X7R, Max Operating Temperature=125°C, Min Operating Temperature=-55°C, Package Quantity=10000, Tolerance=10%, Voltage Rating (DC)=16V, Capacitance=4.7uF, Case/Package=0805, Height=1.25mm, Length=2mm, Packaging="Tape and Reel", Termination=SMD/SMT, Weight=0.000335oz, Width=1.25mm
C4 C5: library part CMP-06035-043857-1, "Ceramic Capacitor for Automotive 2.2uF ±10% 16VDC X7R 0805 Embossed T/R", Case Code (Imperial)=0805, Case Code (Metric)=2012, Dielectric=X7R, Max Operating Temperature=125°C, Min Operating Temperature=-55°C, Package Quantity=10000, Tolerance=10%, Voltage Rating=16V, Capacitance=2.2uF, Case/Package=0805, Depth=1.25mm, Height=1.25mm, Length=2mm, Mount="Surface Mount", Packaging="Tape and Reel", Radiation Hardening=No, Termination=SMD/SMT, Voltage Rating (DC)=16V, Width=1.25mm
C6 C7 C9 C12 C33: library part CMP-06035-062264-1, "CAP CER MLCC", RoHS Compliant=Yes
C10 C11 C35 C36 C38 C39 C40 C43 C44 C46: library part CMP-03422-000924-1, "CAP CER 1UF 16V X7R 0603", Capacitance="1 uF", Manufacturer=YAGEO, Manufacturer Part Number=CC0603KRX7R7BB105, Package=CC0603-DA, Temperature="-55°C to +125°C", Temperature Characteristic=X7R, Temperature Coefficient=15%, Temperature Range High=+125°C, Temperature Range Low=-55°C, Tolerance=0.1, Voltage="16 V", Automotive=No, Category=Cap, ComponentLink2Description=Datasheet, ComponentLink2URL=http://www.yageo.com/documents/recent/UPY-GPHC_X7R_6.3V-to-50V_18.pdf, Device Class L1="Passive Components", Device Class L2=Capacitors, Device Class L3="Ceramic Capacitors", Digikey Description="CAP CER 1UF 16V X7R 0603", Footprint Url=http://www.yageo.com/exep/pages/download/literatures/UPY-C_GEN_24.pdf, Height=0.9mm, Lead Free=Yes, Material=Ceramic, Mouser Description="Multilayer Ceramic Capacitor, CC Series, 1 - F, - 10%, X7R, 16 V, 0603 [1608 Metric]", Octopart=https://octopart.com/cc0603krx7r7bb105-yageo-42271928, RoHS=TRUE, Voltage Rating="16 V"
C13: library part CMP-08246-001259-1, "Cap Ceramic 100nF 50V X7R 10% Pad SMD 0603 +125°C Automotive T/R", Capacitance=100nF, Case Code (Imperial)=0603, Case Code (Metric)=1608, Dielectric=X7R, Max Operating Temperature=125°C, Min Operating Temperature=-55°C, Package Quantity=4000, Ratings=AEC-Q200, Tolerance=10%, Voltage Rating=50V, Case/Package=0603, Composition=Ceramic, Depth=0.8mm, Height=0.8mm, Length=1.6mm, Mount="Surface Mount", Packaging="Tape and Reel", Termination=SMD/SMT, Thickness=0.035inch, Voltage Rating (DC)=50V, Weight=7.1E-05oz, Width=0.8mm
C14: library part CMP-1035-01967-3, "CAP CER 1500PF 100V NP0 0603", Capacitance="1,500 pF", Manufacturer=KEMET, Manufacturer Part Number=C0603C152J1GACTU, Package=C0603C-CF, Temperature="-55°C to +125°C", Temperature Characteristic=C0G, Temperature Coefficient=30ppm/°C, Temperature Range High=+125°C, Temperature Range Low=-55°C, Tolerance=0.05, Voltage Rating="100 V", Automotive=Yes, Automotive Grade="Grade 1", Category=Cap, ComponentLink2Description=Datasheet, ComponentLink2URL=https://api.kemet.com/component-edge/download/datasheet/C0603C100J5GACAUTO.pdf, Device Class L1="Passive Components", Device Class L2=Capacitors, Device Class L3="Ceramic Capacitors", Digikey Description="CAP CER 1500PF 100V NP0 0603", Height=0.87mm, Lead Free=Yes, Material=Ceramic, Mouser Description="Cap Ceramic 0.0015uF 100V C0G 5% SMD 0603 125°C Paper T/R", Octopart=https://octopart.com/c0603c152j1gactu-kemet-12793172, RoHS=TRUE
C15 C16 C17 C18 C19 C20 C21 C22 C23 C24 C25 C26 C27 C28 C29 C30 C31: library part CMP-2006-03365-2, "CAP CER 1000PF 50V 1% NP0 0603", Capacitance="1,000 pF", Manufacturer=KEMET, Manufacturer Part Number=C0603C102F5GACTU, Package=C0603C-CF, Temperature="-55°C to +125°C", Temperature Characteristic=C0G, Temperature Coefficient=30ppm/°C, Temperature Range High=+125°C, Temperature Range Low=-55°C, Tolerance=0.01, Voltage Rating="50 V", Automotive=Yes, Automotive Grade="Grade 1", Category=Cap, ComponentLink2Description=Datasheet, ComponentLink2URL=https://api.kemet.com/component-edge/download/datasheet/C0603C100J5GACAUTO.pdf, Device Class L1="Passive Components", Device Class L2=Capacitors, Device Class L3="Ceramic Capacitors", Digikey Description="CAP CER 1000PF 50V 1% NP0 0603", Height=0.87mm, Lead Free=Yes, Material=Ceramic, Mouser Description="Cap Ceramic 0.001uF 50V C0G 1% SMD 0603 125°C Paper T/R", Octopart=https://octopart.com/c0603c102f5gactu-kemet-9139790, RoHS=TRUE
C32 C37 C41 C42 C45 C47: library part CMP-2006-00001-1, Manufacturer=Kemet, Part Number=C0603X104J4RACTU
C34: library part CMP-06035-033997-1, "Chip Multilayer Ceramic Capacitors for General Purpose, 1206, 100uF, X5R, 15%, 20%, 10V"
D1 D2 D3 D4 D5: "Quad 0.7-pF, Â±5.5-V, Â±12-kV ESD protection diode with 0.5-nA max leakage in SOT & SC70 packages", Package="SOT-SC70-6 Texas Instruments", Check_prices=https://www.snapeda.com/parts/TPD4E1B06DCKR/Texas+Instruments/view-part/?ref=eda, MF="Texas Instruments", MP=TPD4E1B06DCKR, SnapEDA_Link=https://www.snapeda.com/parts/TPD4E1B06DCKR/Texas+Instruments/view-part/?ref=snap
D6: library part CMP-1061-00629-1, "Transient Voltage Suppressor Diode, for ESD Protection, 2-Pin SOD-323, Pb-Free, Tape and Reel", Manufacturer="On Semiconductor", ComponentLink1Description="Manufacturer URL", ComponentLink1URL=http://www.onsemi.com/, ComponentLink2Description=Datasheet, ComponentLink2URL=http://www.onsemi.com/pub_link/Collateral/SD05T1-D.PDF, ComponentLink3Description="Package Specification", ComponentLink3URL=http://www.onsemi.com/pub_link/Collateral/SD05T1-D.PDF, DatasheetVersion="Rev. 2", Direction=Unidirectional, IR Max (uA)=10, Mounting Technology="Surface Mount", PackageDescription="2-Pin SOD, Body 1.7 x 1.25 mm", PackageReference=SOD-323-2-477-02_G, PackageVersion="Rev. G, 02/2005", Packing="Tape and Reel", PartNumber=SD05T1G, PPK Max (W)=350, RoHS=Pb-Free
D7: library part CMP-00278-54317238-1, "ESD5Z5.0T5G Trans Voltage Suppressor Diode, 174W, 5V V(RWM), Unidirectional, 1 Element, Silicon", Breakdown Voltage=6.2V, Capacitance=80pF, Clamping Voltage=18.6V, Manufacturer Lifecycle Status=ACTIVE, Max Junction Temperature (Tj)=150°C, Max Power Dissipation=500mW, Min Operating Temperature=-55°C, Peak Pulse Current=9.4A, Peak Pulse Power=174W, Power Line Protection=No, Reverse Standoff Voltage=5V, Composition=Zener, Direction=Unidirectional, Height=700µm, Lead Free="Lead Free", Lifecycle Status=Production, Max Operating Temperature=150°C, Min Breakdown Voltage=6.2V, Mount="Surface Mount", NexarPartId=54317238, Number of Channels=1, Number of Unidirectional Channels=1, Packaging="Tape & Reel (TR)", RoHS=Compliant
J1: library part CMP-1755-00004-1, "Male Header, Pitch 2 mm, 1 x 2 Position, Height 4.8 mm, Tail Length 3.4 mm, -25 to 85 degC, RoHS, Bulk", Capacitance="10 uF", Case\Package=Radial, Max Operating Temperature="85 degC", Min Operating Temperature="-40 degC", Package Quantity=200, Tolerance=20%, Voltage Rating="50 V", ComponentLink1Description=Datasheet, ComponentLink1URL=http://www.jst-mfg.com/product/pdf/eng/ePH.pdf, DatasheetVersion=Dec-12, Diameter="5 mm", Height="11 mm", Lead Pitch="2 mm", Length="11 mm", Mount="Through Hole", PackageDescription="Male Header, Pitch 2 mm, 1 x 2 Position, Height 4.8 mm, Tail Length 3.4 mm", PackageReference=S2B-PH-K-S, Packaging=Bulk, Pins=2, Radiation Hardening=No, REACH SVHC="No SVHC", RoHSCompliant=true, Voltage Rating (DC)="50 V"
J2: library part CMP-04767-000028-2, "CONN RCP USB2.0 TYP C 24P SMD RA", Current Rating=1.25A, Max Operating Temperature=85°C, Min Operating Temperature=-40°C, Voltage Rating=30V, Contact Material="Gold, Nickel", Gender=Receptacle, Height=3.36mm, NexarPartId=117190526, Number of Contacts=16, USB Standard="USB 2.0"
J3A J3B J3C J3D J3E J3F J3G J3H J3I J3J JP1: library part CMP-1024-00329-1, "0.025\" SQ Post Header, Through-hole, Vertical, -55 to 125 degC, 2.54 mm Pitch, 2-Pin, Male, RoHS", Manufacturer=Samtec, Temperature Range="-55 to 125 degC", ComponentLink1Description="Manufacturer URL", ComponentLink1URL=http://www.samtec.com, ComponentLink2Description=Datasheet, ComponentLink2URL=http://www.samtec.com/documents/webfiles/pdf/TSW_TH.PDF, ComponentLink3Description="Package Specification", ComponentLink3URL=http://www.samtec.com/documents/webfiles/cpdf/TSW-XXX-XX-XXX-X-XX-XXX-MKT.pdf, DatasheetVersion=F-214, Mounting Technology=Through-hole, Orientation=Vertical, PackageDescription=".025[0.64] SQ. Post Terminal Strip Assembly", PackageReference=TSW-102-26-XX-S, PackageVersion="DM, 8/1988", PartNumber=TSW-102-26-F-S, Pitch="2.54 mm", RoHS=True
J5: library part CMP-1024-00332-1, "0.025\" SQ Post Header, Through-hole, Vertical, -55 to 105 degC, 2.54 mm Pitch, 3-Pin, Male, RoHS", Manufacturer=Samtec, Temperature Range="-55 to 105 degC", ComponentLink1Description="Manufacturer URL", ComponentLink1URL=http://www.samtec.com, ComponentLink2Description=Datasheet, ComponentLink2URL=http://www.samtec.com/documents/webfiles/pdf/TSW_TH.PDF, ComponentLink3Description="Package Specification", ComponentLink3URL=http://www.samtec.com/documents/webfiles/cpdf/TSW-XXX-XX-XXX-X-XX-XXX-MKT.pdf, DatasheetVersion=F-214, Mounting Technology=Through-hole, Orientation=Vertical, PackageDescription=".025[0.64] SQ. Post Terminal Strip Assembly", PackageReference=TSW-103-07-X-S, PackageVersion="DM, 8/1988", PartNumber=TSW-103-07-T-S, Pitch="2.54 mm", RoHS=True
R1: library part CMP-02407-000546-1, "RES SMD 100 OHM 1% 1/8W 0603", Case/Package=0603, Max Operating Temperature=125°C, Max Power Dissipation=100mW, Min Operating Temperature=-55°C, Package Quantity=1000, Resistance=130kR, Temperature Coefficient=25ppm/°C, Tolerance=0.1%, Voltage Rating (DC)=50V, Composition="Thin Film", Contact Plating=Tin, Depth=0.85mm, Height=0.022inch, Lead Free="Lead Free", Length=0.061inch, Military Standard=Not, Number of Terminations=2, Packaging="Tape and Reel", Radiation Hardening=No, Width=0.033inch
R2: library part CMP-2000-04351-2, "RES SMD 120K OHM 0.1% 1/10W 0603", Manufacturer=Yageo, Manufacturer Part Number=RT0603BRD07120KL, Package=RT0603, Power Rating=0.1W, Resistance=120KΩ, Temperature="-55°C to +155°C", Temperature Coefficient="25 ppm/°C", Temperature Range High=+155°C, Temperature Range Low=-55°C, Tolerance=0.001, Voltage Rating=75V, Automotive=No, Category=Res, ComponentLink2Description=Datasheet, ComponentLink2URL=http://www.yageo.com/documents/recent/PYu-RT_1-to-0.01_RoHS_L_9.pdf, Composition="Thin Film", Device Class L1="Passive Components", Device Class L2=Resistors, Device Class L3="Chip SMD Resistors", Digikey Description="RES SMD 120K OHM 0.1% 1/10W 0603", Footprint Url=http://www.yageo.com/exep/pages/download/literatures/PYu-R_Mount_10.pdf, Height=0.55mm, Ipc Land Pattern Name=RESC16080X45, Lead Free=Yes, Mouser Description="Thin Film Resistors - SMD 1/10W 120K ohm .1% 25ppm", Octopart=https://octopart.com/rt0603brd07120kl-yageo-1373701, RoHS=TRUE, Series=RT
R3: library part CMP-03412-002786-1, "RES SMD 105K OHM 0.1% 1/10W 0603", Manufacturer=Yageo, Manufacturer Part Number=RT0603BRD07105KL, Package=RT0603, Power Rating=0.1W, Resistance=105KΩ, Temperature="-55°C to +155°C", Temperature Coefficient="25 ppm/°C", Temperature Range High=+155°C, Temperature Range Low=-55°C, Tolerance=0.001, Voltage Rating=75V, Automotive=No, Category=Res, ComponentLink2Description=Datasheet, ComponentLink2URL=http://www.yageo.com/documents/recent/PYu-RT_1-to-0.01_RoHS_L_9.pdf, Composition="Thin Film", Device Class L1="Passive Components", Device Class L2=Resistors, Device Class L3="Chip SMD Resistors", Digikey Description="RES SMD 105K OHM 0.1% 1/10W 0603", Footprint Url=http://www.yageo.com/exep/pages/download/literatures/PYu-R_Mount_10.pdf, Height=0.55mm, Ipc Land Pattern Name=RESC16080X45, Lead Free=Yes, Mouser Description="Thin Film Resistors 1/10W 105K ohm .1% 25ppm", Octopart=https://octopart.com/rt0603brd07105kl-yageo-1216175, RoHS=TRUE, Series=RT
R4: library part CMP-03412-009298-2, "Thin Film Chip Resistors Automotive Grade 100kΩ 0.1% 25ppm/°C 0603", Case Code (Imperial)=0603, Case Code (Metric)=1608, Max Operating Temperature=155°C, Max Power Dissipation=100mW, Min Operating Temperature=-55°C, Ratings=AEC-Q200, Resistance=100kR, Resistor Type="Thin Film", Temperature Coefficient=25ppm/°C, Tolerance=0.1%, Case/Package=0603, Features="Moisture Resistant", Height=0.022inch, Length=0.063inch, Number of Terminations=2, Packaging="Cut Tape", RoHS Compliant=Yes, Series=AT, Width=0.032inch
R5 R6: library part CMP-2000-04778-2, "RES SMD 5.1K OHM 1% 1/10W 0603", Manufacturer=Yageo, Manufacturer Part Number=RT0603FRE075K1L, Package=RT0603, Power Rating=0.1W, Resistance=5.1KΩ, Temperature="-55°C to +155°C", Temperature Coefficient="50 ppm/°C", Temperature Range High=+155°C, Temperature Range Low=-55°C, Tolerance=0.01, Voltage Rating=75V, Automotive=No, Category=Res, ComponentLink2Description=Datasheet, ComponentLink2URL=http://www.yageo.com/documents/recent/PYu-RT_1-to-0.01_RoHS_L_9.pdf, Composition="Thin Film", Device Class L1="Passive Components", Device Class L2=Resistors, Device Class L3="Chip SMD Resistors", Digikey Description="RES SMD 5.1K OHM 1% 1/10W 0603", Footprint Url=http://www.yageo.com/exep/pages/download/literatures/PYu-R_Mount_10.pdf, Height=0.55mm, Ipc Land Pattern Name=RESC16080X45, Lead Free=Yes, Mouser Description="Res Thin Film 0603 5.1K Ohm 1% 0.1W(1/10W) ±50ppm/C Epoxy Pad SMD T/R", Octopart=https://octopart.com/rt0603fre075k1l-yageo-1421390, RoHS=TRUE, Series=RT
R7 R8 R28 R29 R30 R31 R32 R33 R34 R35: library part CMP-03412-038553-1, "RES 10kΩ 1.00% 0.2W 0603"
R9: library part CMP-02407-007592-1, "RES SMD 100 OHM 1% 1/8W 0603", Case/Package=0603, Max Operating Temperature=125°C, Min Operating Temperature=-55°C, Resistance=1MR, Tolerance=1%, Composition="Thin Film", Depth=0.85mm, Lead Free="Lead Free", Length=1.55mm, Military Standard=Not, Packaging="Tape and Reel"
R10 R11 R12 R13 R14 R15 R16 R17 R18 R19 R20 R21 R22 R23 R24 R25 R26 R27: library part CMP-02407-000735-1, "RES SMD 100 OHM 1% 1/8W 0603", Case/Package=0603, Max Operating Temperature=125°C, Min Operating Temperature=-55°C, Resistance=2.2kR, Tolerance=0.1%, Composition="Thin Film", Depth=0.85mm, Lead Free="Lead Free", Length=1.55mm, Military Standard=Not, Packaging="Tape and Reel", Width=850um
SW1: library part CMP-10038-000019-1, "SWITCH SLIDE SPDT 6A 120V", Actuator Color=Black, Contact Current Rating=6A, Contact Resistance=10mR, Flammability Rating="UL94 V-0", Insulation Resistance=1GR, Max Operating Temperature=65°C, Max Voltage Rating (AC)=250V, Max Voltage Rating (DC)=28V, Min Operating Temperature=-30°C, Package Quantity=1, Voltage Rating (AC)=120V, Actuator Length=5.08mm, Actuator Material=Nylon, Actuator Type=Standard, Approvals=UL, Body Material="Stainless Steel", Contact Material=Copper, Contact Plating=Silver, Current Rating=6A, Depth=6.6mm, Electrical Life=40000Cycles, Housing Material="Stainless Steel", Lead Free="Lead Free", Length=12.7mm, Max Current Rating=6A, Mount="Through Hole", Number of Poles=1, Number of Positions=3, Orientation=Vertical, Packaging=Bulk, REACH SVHC="No SVHC", Series=1000, Switch Function=On-On, Switch Travel=2.16mm, Termination="PC Pins", Throw Configuration=SPDT, Voltage Rating (DC)=28V
SW2 SW3: library part CMP-07427-000007-1, "SWITCH TACTILE SPST-NO 0.1A 16V", Case/Package=SMD/SMT, Current Rating=100mA, Max Operating Temperature=125°C, Min Operating Temperature=-55°C, Operating Force=300gf, Package Quantity=50, Voltage Rating (DC)=16V, Actuator Material=Rubber, Actuator Type=Standard, Contact Material=Gold, Contact Plating=Silver, Depth=5mm, Illumination Type=Non-Illuminated, Length=5mm, Max Current Rating=100mA, Mechanical Life=100000Cycles, Mount="Surface Mount", Orientation=Straight, Packaging=Rail/Tube, RoHS Compliant=Yes, Series=7914, Switch Function=Off-Mom, Termination=J-Hook, Throw Configuration=SPST
TP1: library part CMP-1672-00009-1, "Test Point, Orange, 1-Pin THD, RoHS", Forward Current="3 A", Forward Voltage="1.08 V", Max Operating Temperature="150 degC", Max Surge Current="80 A", Min Operating Temperature="-65 degC", Package Quantity=500, Peak Reverse Current="600 uA", ComponentLink1Description="Manufacturer URL", ComponentLink1URL=http://www.keyelco.com/, ComponentLink2Description=Datasheet, ComponentLink2URL=http://keyelco.com/userAssets/file/M65p56.pdf, DatasheetVersion=Jun-15, Diameter="5.3 mm", Height="0.25 inch", Length="9.5 mm", Mount="Through Hole", PackageDescription="1-Pin Through Hole Device, Dia 2.54 mm", PackageReference=5003, Packaging=Bulk, Pins=2, Radiation Hardening=No, REACH SVHC="No SVHC", RoHSCompliant=true, Weight="0.01 lb", Width="0.25 inch"
TP2 TP3 TP4 TP5 TP6: library part TestPoint_SMD, "2mm diameter circular test point,"
U1: library part CMP-04918-000139-2, "IC REG CHARGE PUMP ADJ DL 12WSON", Max Input Voltage=5.5V, Max Operating Temperature=85°C, Max Output Voltage=5V, Min Input Voltage=2.7V, Min Operating Temperature=-40°C, Min Output Voltage=1.5V, Output Current=250mA, Quiescent Current=390uA, Switching Frequency=2.3MHz, Lead Free="Lead Free", Mount="Surface Mount", Output Type=Adjustable, Packaging="Tape and Reel", RoHS Compliant=Yes, Synchronous Rectifier=No, Topology="Charge Pump"
U2: library part CMP-04917-000028-1, "IC REG LINEAR 3.3V 1A SOT23-5", Dropout Voltage=1350mV, Manufacturer="Texas Instruments", Max Junction Temp=+125°C, Max Supply Voltage=5.5V, Min Supply Voltage=1.45V, Output Current=1A, Output Voltage=3.3V, Package=DBV0005A, Temperature="-40°C to +125°C", Temperature Range Low=-40°C, Accuracy Percentage=1%, Automotive=No, Category=IC, ComponentLink2Description=Datasheet, ComponentLink2URL=http://www.ti.com/lit/ds/symlink/tlv757p.pdf, Device Class L1="Integrated Circuits (ICs)", Device Class L2="Power Management ICs", Device Class L3="Voltage Regulators - Linear", Digikey Description="IC REG LINEAR 3.3V 1A SOT23-5", Height=1.45mm, Ipc Land Pattern Name=SOT95P280X145-5, Lead Free=Yes, Manufacturer Part Number=TLV75733PDBVR, Mouser Description="1-A low-IQ small-size low-dropout (LDO) regulator 5-SOT-23 -40 to 125", Number Of Outputs=1, Octopart=https://octopart.com/tlv75733pdbvr-texas+instruments-91437073, Output Type=Fixed, RoHS=TRUE, Standoff Height=0mm, Temperature Range High=+125°C
U3: library part CMP-04917-000300-1, "IC REG LINEAR 3.3V 300MA SOT23-5", RoHS Compliant=Yes
U4: library part CMP-0841-00001-2, "Low-Noise, 8-Channel, 24-Bit Analog Front-End for Biopotential Measurement, 16 KSPS, -40 to 85 degC, 64-Pin PQFP (PAG-64), RoHS, Tape and Reel", Manufacturer="Texas Instruments", Operating Temperature Range (C)="-40 to 85", # Input Channels=8, Architecture=Delta-Sigma, ComponentLink1Description="Manufacturer URL", ComponentLink1URL=http://www.ti.com/, ComponentLink2Description=Datasheet, ComponentLink2URL=http://www.ti.com/lit/ds/symlink/ads1299.pdf, ComponentLink3Description="Package Specification", ComponentLink3URL=http://www.ti.com/lit/ml/mtqf006a/mtqf006a.pdf, DatasheetVersion=SBAS499A, Interface="Serial SPI", Mounting Technology="Surface Mount", PackageDescription="64-Pin Plastic Quad Flatpack, Body 10 x 10 mm, Pitch 0.5 mm", PackageReference=PAG-64, PackageVersion=4040282/C, Packing=PAG0064A, PartNumber=ADS1299IPAGR, Reference Mode="Int, Ext", Resolution (Bits)=24, RoHS=TRUE, Sample Rate (max) (KSPS)=16
U5: "Bluetooth, WiFi 802.11b/g/n, Bluetooth v5.0 Transceiver Module 2.4GHz PCB Trace Surface Mount", Package=None, Availability="In Stock", Check_prices=https://www.snapeda.com/parts/ESP32-S3-WROOM-1-N8R8/Espressif+Systems/view-part/?ref=eda, MF="Espressif Systems", MP=ESP32-S3-WROOM-1-N8R8, Price=None, Purchase-URL=https://pricing.snapeda.com/search?q=ESP32-S3-WROOM-1-N8R8&ref=eda, SnapEDA_Link=https://www.snapeda.com/parts/ESP32-S3-WROOM-1-N8R8/Espressif+Systems/view-part/?ref=snap

## Free pads (board coordinates)
  round 6 hole 3.2 unplated mask+0.1: M1(5,5) M2(5,45) M3(95,45) M4(95,5)

## Via types
v1: diameter 0.6, hole 0.3, Top Layer to Bottom Layer, tented both sides, 345 vias

## Nets (pads, with @x,y where several pads share a name; then routed paths per layer and width w, separated by ;. In a path a pad name is that pad's centre, name@x,y a point inside that pad or via, vN(x,y) a via of type N, cw(c..) or ccw(c..) an arc to the next point about the centre after c; other vN are vias at no path point)
1N: D5.1 J3I.2 R25.1 | length 11.5
  Top Layer w0.254: J3I.2@13.54,11 13.54,9.96 16.535,6.965 17.085,6.965 D5.1@17.15,6.9 17.878,6.9 19.728,8.75 R25.1@22,8.75
1P: D5.2 J3I.1 R26.1 | length 13.9
  Top Layer w0.254: J3I.1@11,11 11.432,10.568 12.007,10.568 16.319,6.256 17.144,6.256 D5.2@17.15,6.25 17.223,6.323 17.802,6.323 18.806,7.327 20.922,7.327 R26.1@21.999,6.25
2N: D4.5 J3H.2 R23.1 | length 10.2
  Top Layer w0.254: J3H.2@13.54,15 15.04,13.5 17.271,13.5 18.698,14.927 19.277,14.927 D4.5@19.35,15 20.749,15 R23.1@22,13.75
2P: D4.4 J3H.1 R24.1 | length 14
  Top Layer w0.254: J3H.1@11,15 12.854,13.146 17.896,13.146 19.1,14.35 D4.4@19.35,14.35 19.423,14.277 19.723,14.277 21.987,12.013 21.987,11.263 R24.1@22,11.25
3N: D4.1 J3G.2 R21.1 | length 11.1
  Top Layer w0.254: J3G.2@13.54,19 13.55,19 16.9,15.65 D4.1@17.15,15.65 17.4,15.65 20.5,18.75 R21.1@22,18.75
3P: D4.2 J3G.1 R22.1 | length 13.2
  Top Layer w0.254: J3G.1@11,19 11.507,18.493 12.007,18.493 15.5,15 D4.2@17.15,15 17.223,15.073 17.802,15.073 18.979,16.25 R22.1@22,16.25
3v3: C7.1 C12.1 C13.1 R7.1 R8.1 TP5.1 U2.5 U5.2 | length 12
  Top Layer w0.254: v1(75.5,21.25) TP5.1@75.5,23.5 ; R7.1@85.7,6.75 v1(86.85,6.75)
  Top Layer w0.508: R8.1@55.1,15.25 v1(56.5,15.25) ; U5.2@76.75,2.1 78.9,2.1 C13.1@79.5,2.7 80.9,2.7 81.45,3.25 C12.1@81.75,3.25 v1(83.5,3.25)
  other v1: 80.75,26.75 81.75,26.75 82.75,26.75
4N: D3.5 J3F.2 R19.1 | length 9.8
  Top Layer w0.254: J3F.2@13.54,23 16.771,23 18.698,24.927 19.277,24.927 D3.5@19.35,25 20.749,25 R19.1@22,23.75
4P: D3.4 J3F.1 R20.1 | length 14.2
  Top Layer w0.254: J3F.1@11,23 11.648,22.352 12.553,22.352 13.061,21.844 16.116,21.844 18.622,24.35 D3.4@19.35,24.35 19.423,24.277 19.723,24.277 21.987,22.013 21.987,21.263 R20.1@22,21.25
5N: D3.1 J3E.2 R17.1 | length 10.3
  Top Layer w0.254: J3E.2@13.54,27 15.55,27 16.9,25.65 17.4,25.65 20.5,28.75 R17.1@22,28.75